# Altium PCB motordriver.PcbDoc (part 1 of 3)
Units mm, origin at the board's own origin, x right, y up, seen from the top; angles counter-clockwise.
Board outline 134.2 x 59.7 mm, 4 copper layers (Top Layer, Mid-Layer 2, Mid-Layer 1, Bottom Layer); 185 components, 161 nets, 637 pads, 1528 vias.
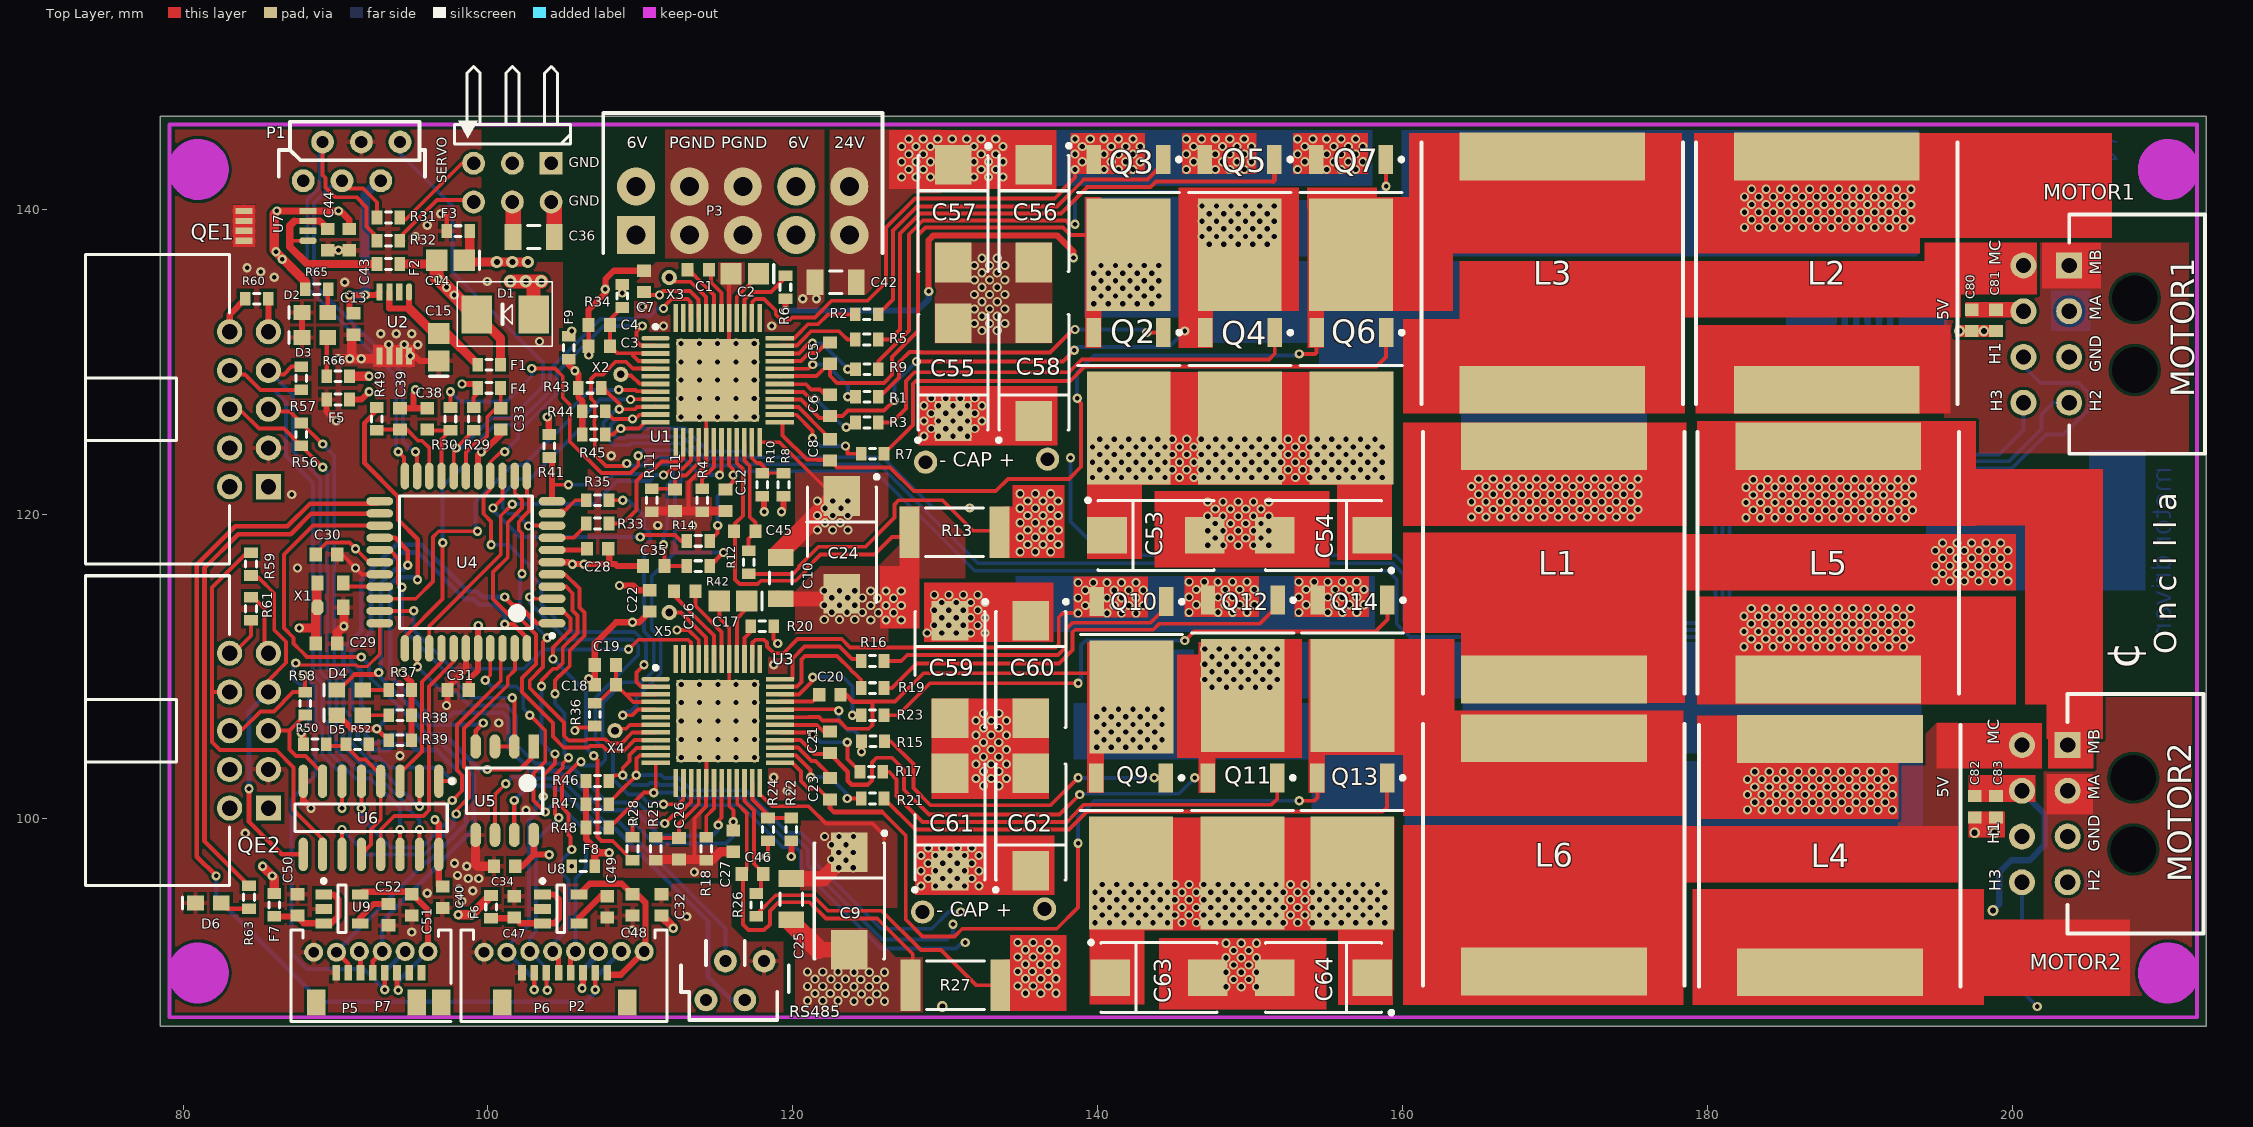
[diagram p0: Top Layer view]
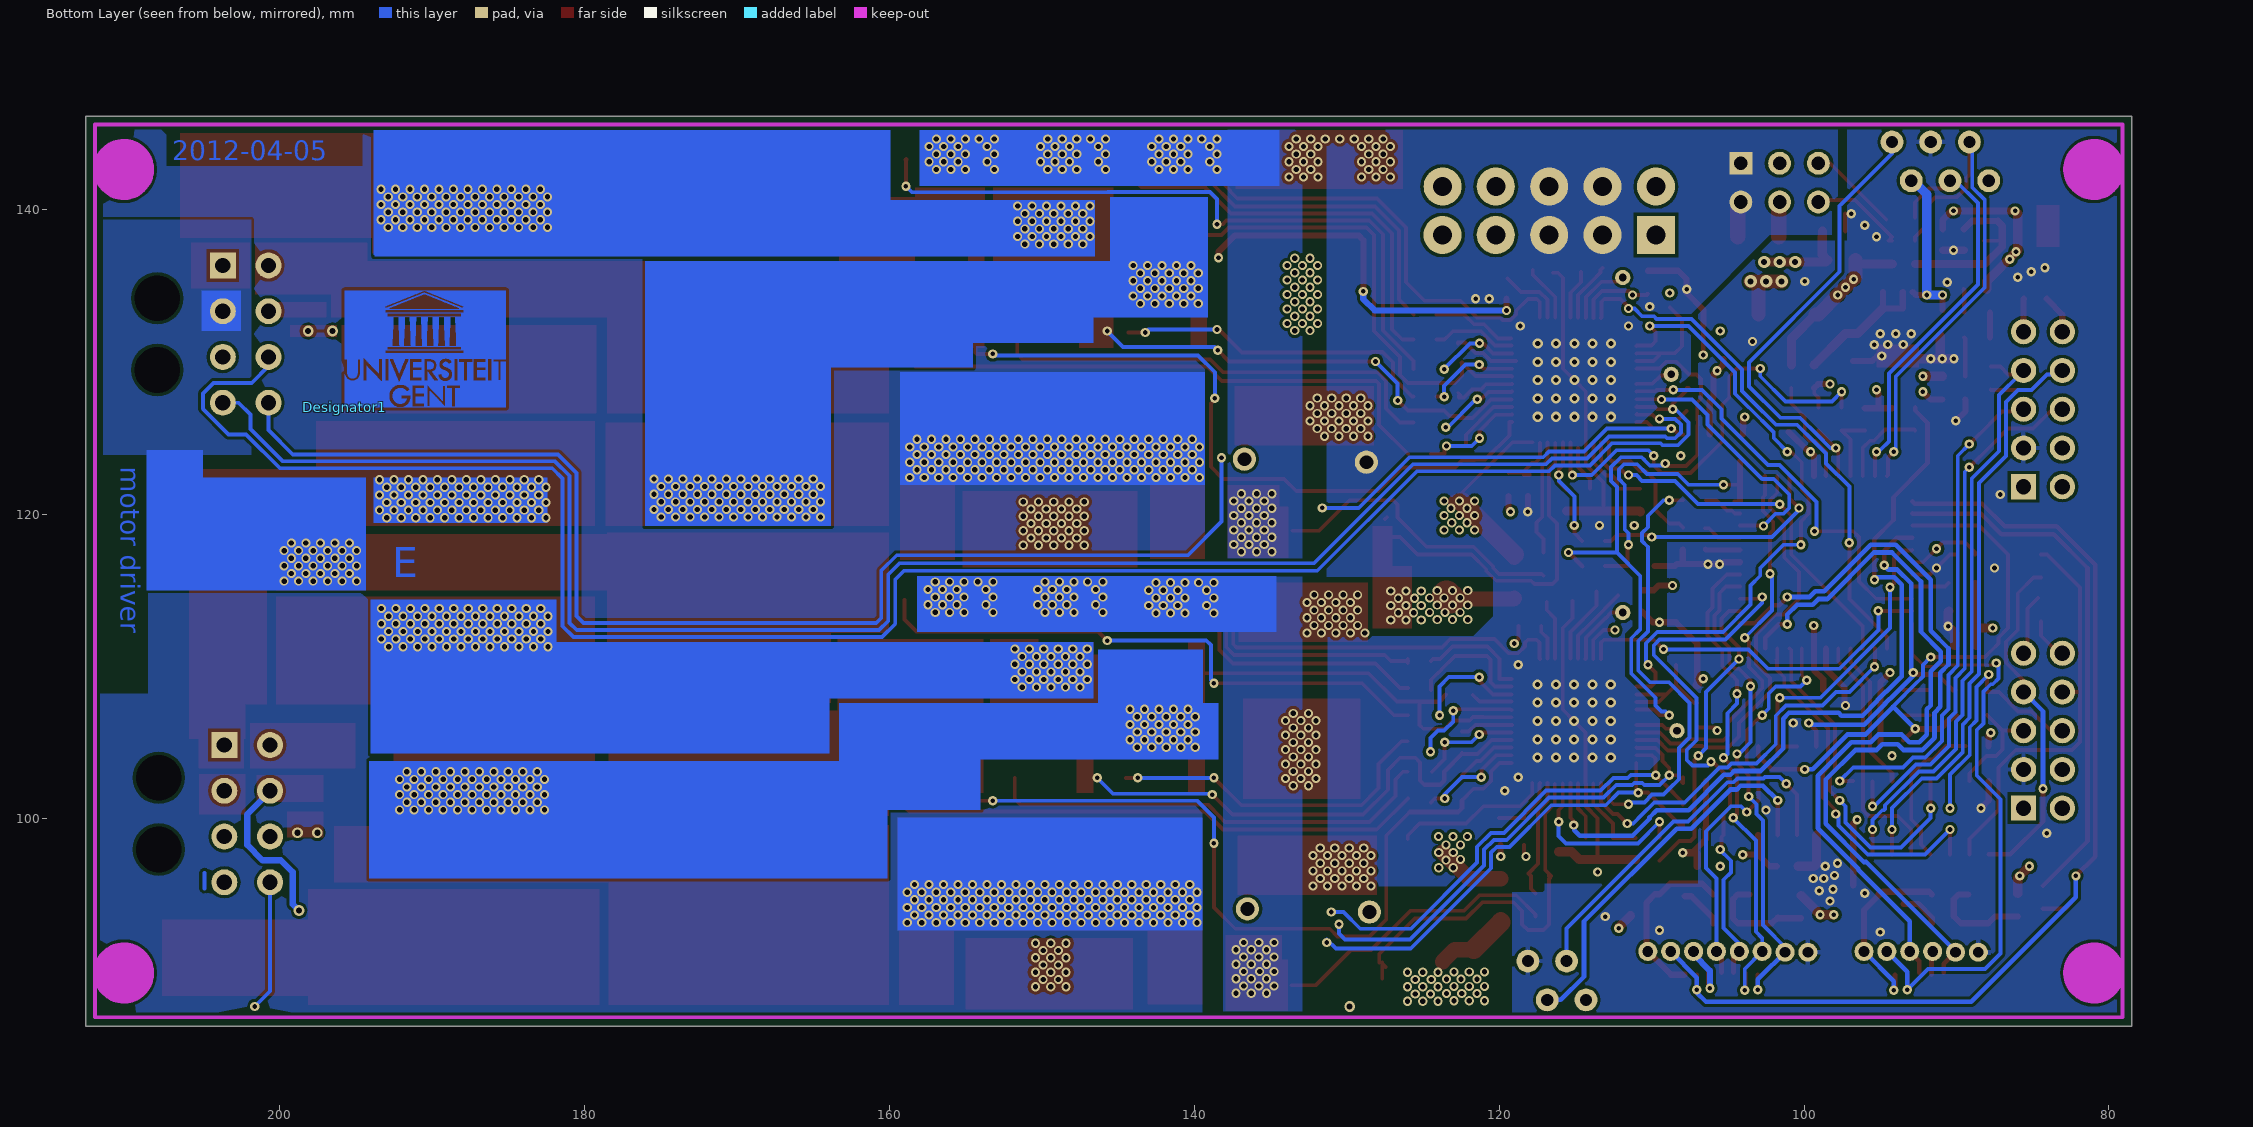
[diagram p1: Bottom Layer view, seen from below]
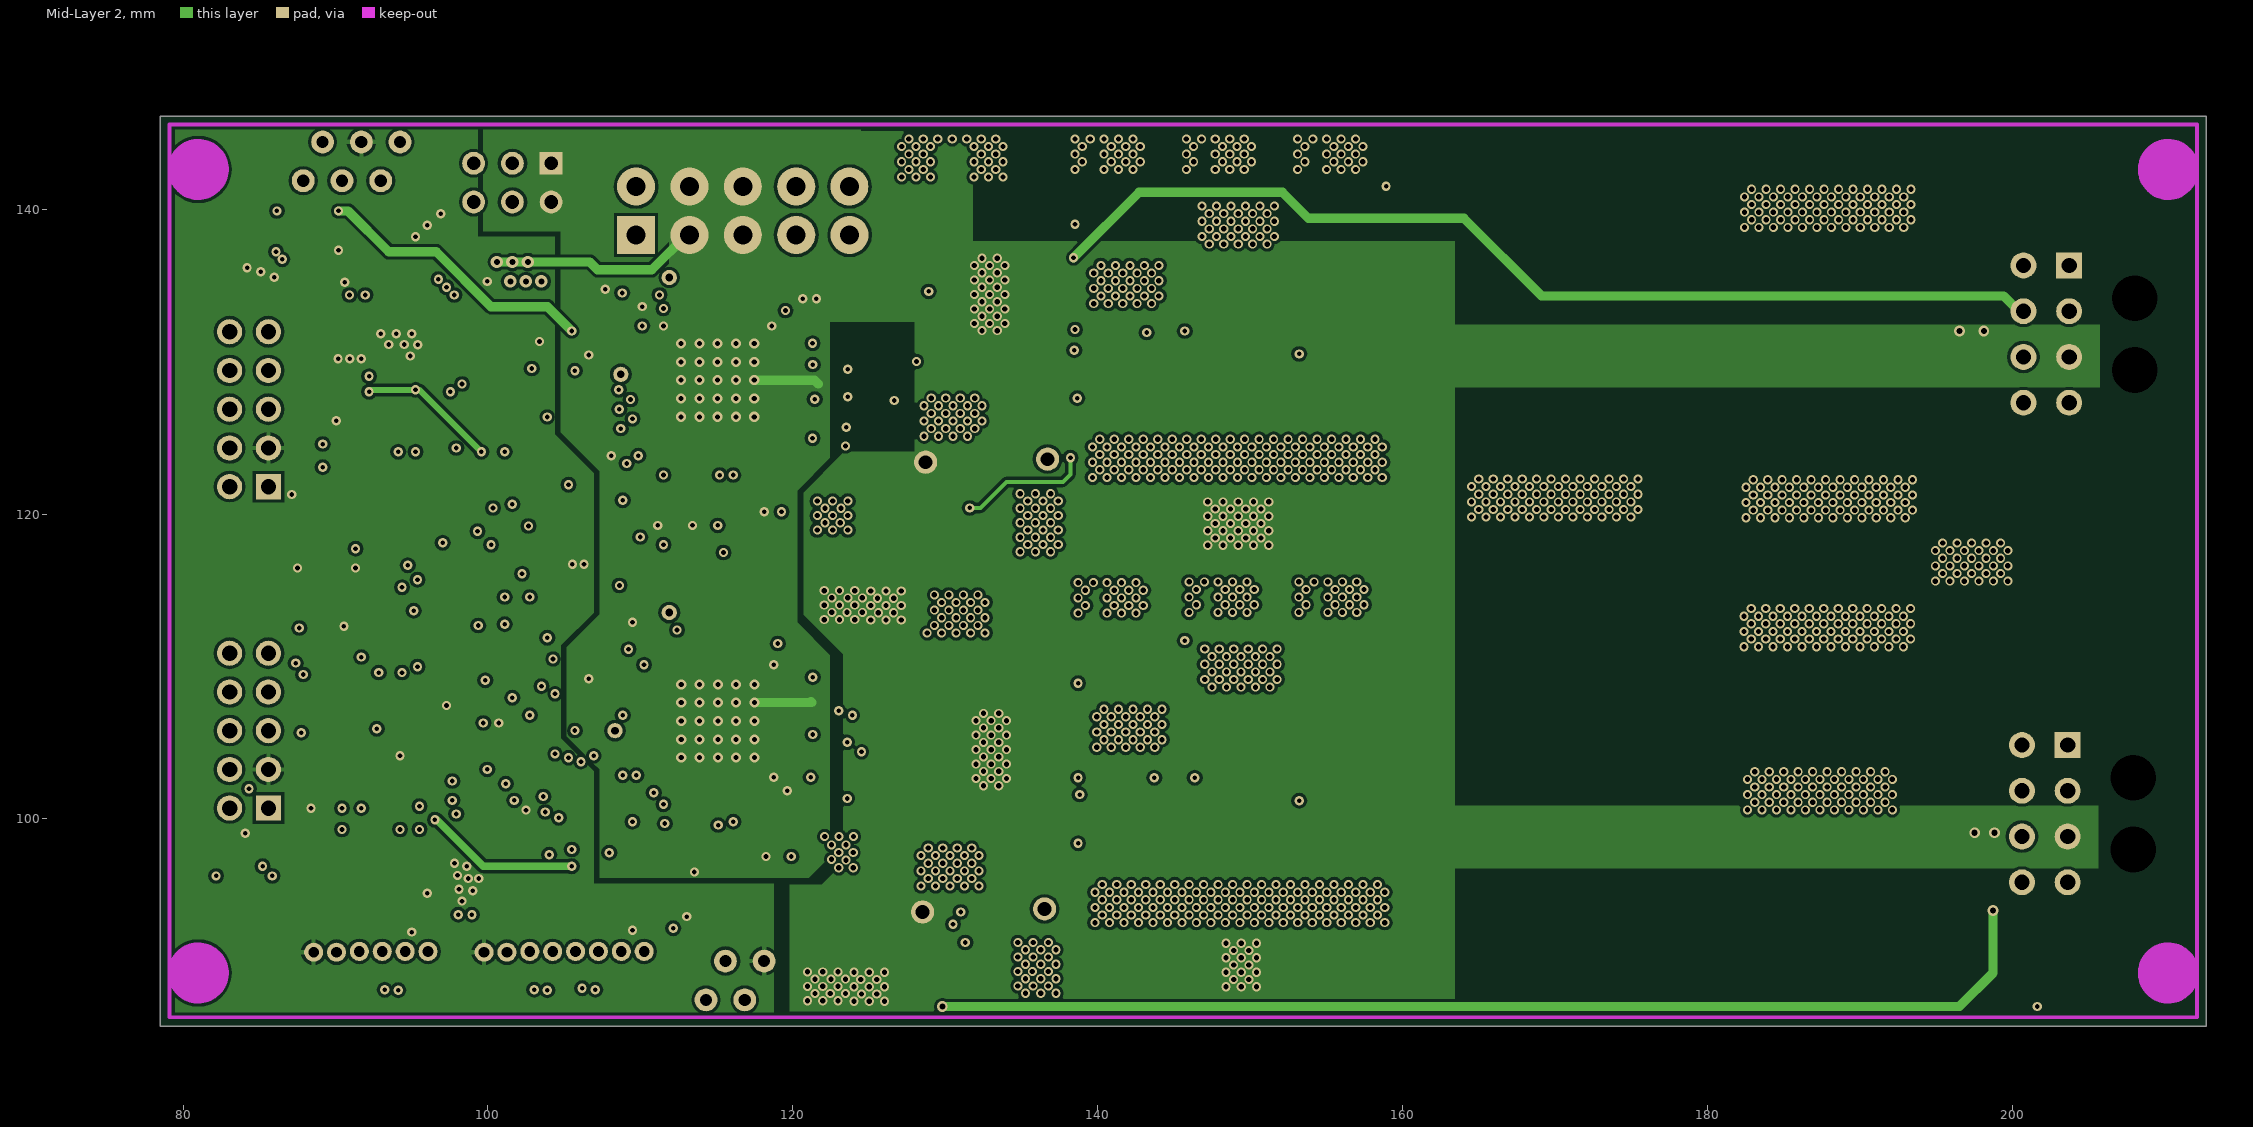
[diagram p2: Mid-Layer 2]
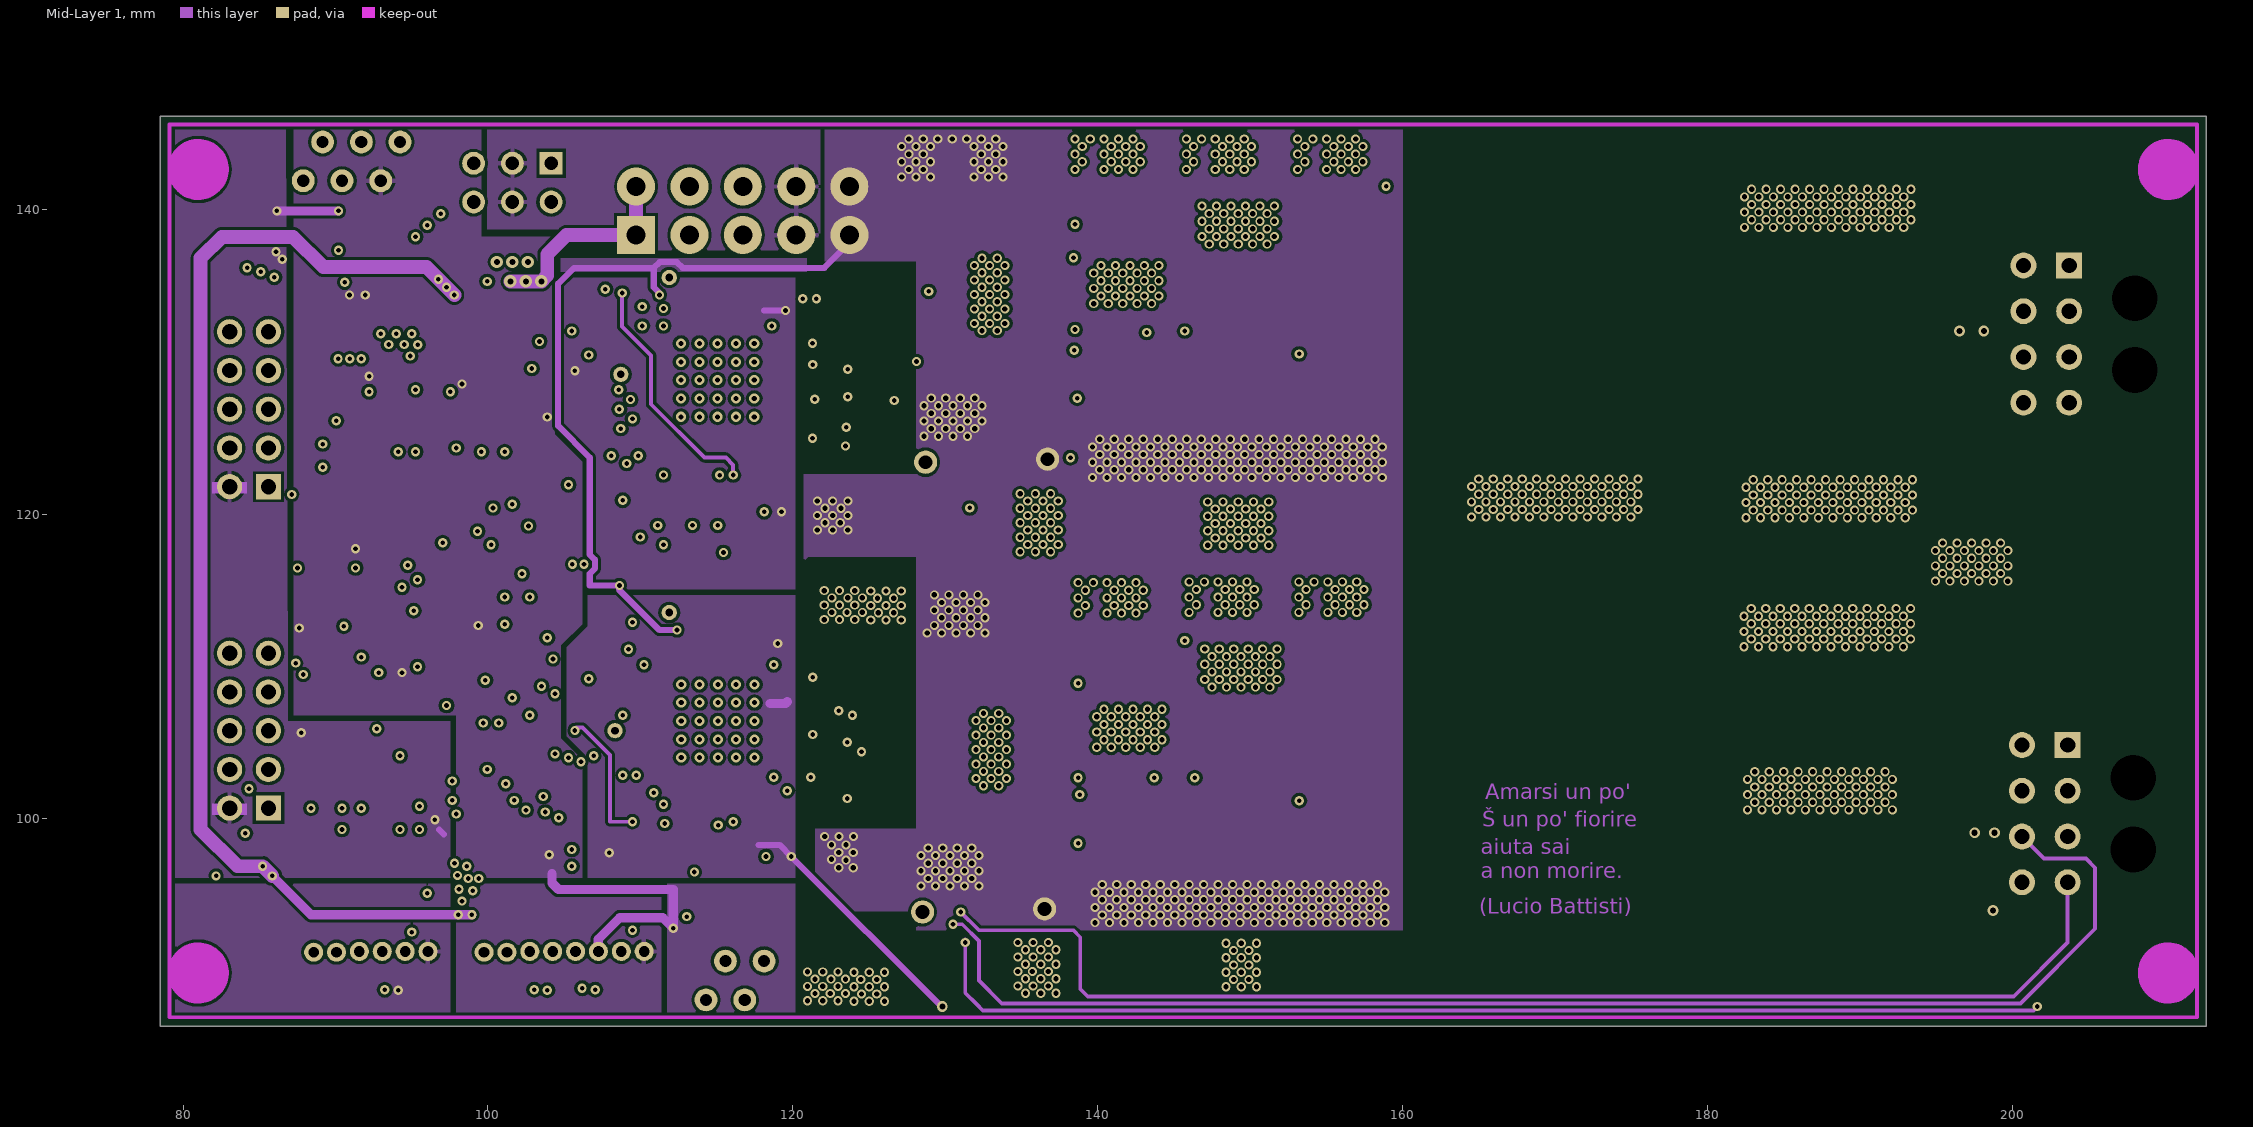
[diagram p3: Mid-Layer 1]

## Layer stack, top to bottom
Top Layer: signal copper 0.0356
Dielectric: core 0.32, FR-4, Dk 4.8
Mid-Layer 2: signal copper 0.0356
Dielectric: prepreg 0.32, FR-4, Dk 4.8
Mid-Layer 1: signal copper 0.0356
Dielectric: core 0.32, FR-4, Dk 4.8
Bottom Layer: signal copper 0.0356

## Board outline
78.5,86.4 78.5,146.1 212.7,146.1 212.7,86.4

## Design rules (kind name [scope] priority, off if disabled: settings)
Clearance [(InPadClass('All Pads')) vs (InPadClass('All Pads'))] p1: gap=0.191
Clearance Clearance_1 [All] p2: gap=0.203
FabricationTestpoint [(IsPad And (OnTopLayer Or OnBottomLayer))] p1: side=3 testpointundercomponent=TRUE minsize=1.016 maxsize=2.54 preferedsize=1.524 minholesize=0 maxholesize=1.016 preferedholesize=0.813 testpointgrid=0.025 allowsidetop=TRUE allowsidebottom=TRUE usegrid=TRUE gridtolerance=0
HoleSize [All] p1: absolutevalues=TRUE maxlimit=3.048 minlimit=0.254 maxpercent=80.000 minpercent=20.000
MinimumSolderMaskSliver [All] p1: minsoldermaskwidth=0.2
PlaneConnect [All] p1: planeconnectstyle=Relief reliefexpansion=0.508 reliefentries=4 reliefconductorwidth=0.406 reliefairgap=0.254
PolygonConnect PolygonConnect_5 [IsVia] p1: connectstyle=Direct reliefconductorwidth=0.254 reliefentries=4 polygonreliefangle="90 Angle"
PolygonConnect PolygonConnect_4 [InNet('AGND')] p2: connectstyle=Direct reliefconductorwidth=0.254 reliefentries=4 polygonreliefangle="90 Angle"
PolygonConnect PolygonConnect_3 [InNet('VMOTOR') And OnLayer('Top Layer')] p3: connectstyle=Direct reliefconductorwidth=0.406 reliefentries=4 polygonreliefangle="90 Angle"
PolygonConnect PolygonConnect_1 [(InNet('NetQ3_3') OR InNet('NetQ10_3'))] p4: connectstyle=Direct reliefconductorwidth=0.254 reliefentries=4 polygonreliefangle="90 Angle"
PolygonConnect [InNet('VMOTOR') And OnLayer('Mid-Layer 1')] p5: connectstyle=Direct reliefconductorwidth=0.406 reliefentries=4 polygonreliefangle="90 Angle"
PolygonConnect PolygonConnect_2 [All] p6: connectstyle=Relief reliefconductorwidth=0.305 reliefentries=4 polygonreliefangle="90 Angle"
RoutingLayers [All] p1: top layer_v5=TRUE mid layer 1_v5=FALSE mid layer 2_v5=FALSE bottom layer_v5=TRUE
RoutingVias [All] p1: holewidth=0.305 width=0.61 viastyle="Through Hole" minholewidth=0.305 minwidth=0.5 maxholewidth=3.048 maxwidth=3.81
SilkscreenOverComponentPads [All] p1: minsilkscreentomaskgap=0.1
SolderMaskExpansion [All] p1: expansion=0
Width [All] p1: maxlimit=3.81 minlimit=0.203 preferedwidth=0.254
22 further rules are at their usual default settings.

## Classes and differential pairs
component class connectors: C32 C36 C40 C80 C81 C82 C83 MOTOR1 MOTOR2 P2 P3 P5 P6 P7 QE1 QE2 R43 R44 R45 R46 R47 R48 R50 R52 R56 R57 R58 R59 R60 R61 RS485 SERVO U6
component class driver1: C1 C2 C3 C4 C5 C6 C7 C8 C9 C10 C11 C12 C45 C53 C54 C55 C56 C57 C58 L1 L2 L3 Q2 Q3 Q4 Q5 Q6 Q7 R1 R2 R3 R4 R5 R6 R7 R8 R9 R10 R11 R12 R13 R14 R34 U1 X2 X3
component class driver2: C16 C17 C18 C19 C20 C21 C22 C23 C24 C25 C26 C27 C46 C59 C60 C61 C62 C63 C64 L4 L5 L6 Q9 Q10 Q11 Q12 Q13 Q14 R15 R16 R17 R18 R19 R20 R21 R22 R23 R24 R25 R26 R27 R28 R36 U3 X4 X5
component class dsPIC: C28 C29 C30 C31 C33 C34 C35 C38 C39 D4 D5 D6 F4 F5 P1 R29 R30 R31 R32 R33 R35 R37 R38 R39 R41 R42 R49 R63 U4 U5 X1
component class power: C13 C14 C15 C42 C43 C44 C47 C48 C49 C50 C51 C52 D1 D2 D3 F1 F2 F3 F6 F7 F8 F9 R65 R66 U2 U7 U8 U9

## Components (designator, comment, footprint, x,y, rotation, side; value= is the part's Value field where it differs from the comment)
C1 "470nF, 25V" CAPC1608L 113.792,136.017 r180 top
C2 "4.7uF, 25V" CAPC2512L 116.84,135.763 r180 top
C3 "100nF" CAPC1608L 107.3,131 r0 top
C4 "4.7uF, 10V" CAPC1608L 107.3,132.4 r0 top
C5 "100nF" CAPC1608L 122.428,130.556 r270 top
C6 "100nF" CAPC1608L 122.428,127.127 r270 top
C7 "100nF" CAPC1608L 110.236,135.255 r270 top
C8 "100nF" CAPC1608L 122.428,124.206 r270 top
C9 "47uF, 35V" 7343 123.698,94.615 r270 top
C10 "10uF, 50V" CAPC3216L 119.2,115.8 r90 top
C11 "1nF" CAPC1608L 112.268,120.904 r90 top
C12 "100nF" CAPC1608L 115.57,120.904 r90 top
C13 "10uF, 6.3V" CAPC1608L 91.186,132.461 r90 top
C14 "10uF, 16V" CAPC2512L 97.536,136.652 r180 top
C15 "1uF, 25V" CAPC2512L 96.774,130.937 r90 top
C16 "470nF, 25V" CAPC1608L 112.903,114.935 r180 top
C17 "4.7uF, 25V" CAPC2512L 116.078,114.3 r180 top
C18 "100nF" CAPC1608L 107.7,108.8 r0 top
C19 "4.7uF, 10V" CAPC1608L 107.7,110.1 r0 top
C20 "100nF" CAPC1608L 122.428,108.139 r0 top
C21 "100nF" CAPC1608L 122.428,105.029 r270 top
C22 "100nF" CAPC1608L 110.617,114.3 r90 top
C23 "100nF" CAPC1608L 122.428,101.981 r270 top
C24 "47uF, 35V" 7343 123.19,117.983 r270 top
C25 "10uF, 50V" CAPC3216L 119.888,94.742 r90 top
C26 "1nF" CAPC1608L 112.534,98.044 r90 top
C27 "100nF" CAPC1608L 116.078,98.552 r90 top
C28 "10uF, 6.3V" CAPC1608L 107.188,117.729 r180 top
C29 "100nF" CAPC1608L 89.408,111.506 r180 top
C30 "100nF" CAPC1608L 89.408,117.348 r180 top
C31 "100nF" CAPC1608L 98.044,108.458 r0 top
C32 "100nF" CAPC1608L 111.379,94.361 r270 top
C33 "1uF, 25V" CAPC1608L 100.838,126.238 r90 top
C34 "100nF" CAPC1608L 101.092,96.901 r180 top
C35 "10nF" CAPC1608L 110.871,116.586 r0 top
C36 "22uF, 16V" CAPC3216L 102.997,138.176 r180 top
C38 "100nF" CAPC1608L 96.012,126.238 r270 top
C39 "100nF" CAPC1608L 94.234,126.238 r270 top
C40 "100nF" CAPC1608L 97.028,94.869 r90 top
C42 "10uF, 50V" CAPC3216L 122.8,135.2 r0 top
C43 "10uF, 6.3V" CAPC1608L 90.9,138 r90 top
C44 "1uF, 25V" CAPC1608L 89.5,138 r90 top
C45 "1nF" CAPC1608L 116.84,118.872 r0 top
C46 "1nF" CAPC1608L 117.348,96.393 r0 top
C47 "1uF, 25V" CAPC1608L 101.727,94.234 r270 top
C48 "10uF, 6.3V" CAPC1608L 109.474,94.361 r90 top
C49 "10nF" CAPC1608L 107.823,94.234 r90 top
C50 "1uF, 25V" CAPC1608L 87.503,94.361 r270 top
C51 "10uF, 6.3V" CAPC1608L 94.996,94.361 r90 top
C52 "10nF" CAPC1608L 93.472,93.726 r90 top
C53 "47uF, 35V" 7343 143.8,118.6 r0 top
C54 "47uF, 35V" 7343 154.8,118.6 r180 top
C55 "47uF, 35V" 7343 130.5,129.3 r90 top
C56 "47uF, 35V" 7343 135.8,139.7 r270 top
C57 "47uF, 35V" 7343 130.5,139.7 r270 top
C58 "47uF, 35V" 7343 135.8,129.3 r90 top
C59 "47uF, 35V" 7343 130.3,109.8 r270 top
C60 "47uF, 35V" 7343 135.6,109.8 r270 top
C61 "47uF, 35V" 7343 130.3,99.8 r90 top
C62 "47uF, 35V" 7343 135.6,99.8 r90 top
C63 "47uF, 35V" 7343 144,89.6 r0 top
C64 "47uF, 35V" 7343 154.8,89.6 r180 top
C80 "1uF" CAPC1608L 197.3,132.7 r90 top
C81 "100nF" CAPC1608L 198.9,132.7 r90 top
C82 "1uF" CAPC1608L 197.5,100.8 r90 top
C83 "100nF" CAPC1608L 198.9,100.8 r90 top
D1 "DIODE-TRANSIL-GENERIC" DIODE-SMB 102.997,133.096 r0 top
D2 "LED Green" CD1608-0603 88.646,133.223 r180 top
D3 "LED Green" CD1608-0603 88.646,131.572 r180 top
D4 "LED Yellow" CD1608-0603 90.932,108.458 r180 top
D5 "LED Red" CD1608-0603 90.932,106.807 r180 top
D6 "LED Green" CD1608-0603 81.661,94.488 r180 top
Designator1 "Comment" ? 195.7,127 r180 bottom
F1 "Ferrit 0.35R 500mA" RESC1608L 100.076,129.794 r180 top
F2 "Ferrit 0.35R 500mA" RESC1608L 93.472,136.398 r180 top
F3 "Ferrit 0.35R 500mA" RESC1608L 98.044,138.557 r0 top
F4 "Ferrit 0.35R 500mA" RESC1608L 100.076,128.27 r0 top
F5 "Ferrit 0.35R 500mA" RESC1608L 90.17,127.508 r0 top
F6 "Ferrit 0.35R 500mA" RESC1608L 100.203,94.234 r270 top
F7 "Ferrit 0.35R 500mA" RESC1608L 85.979,94.361 r270 top
F8 "Ferrit 0.35R 500mA" RESC1608L 106.25,96.9 r180 top
F9 "Ferrit 0.35R 500mA" RESC1608L 105.3,130.9 r90 top
L1 "68 µH" IHLP-6767GZ-11 169.9,116.8 r270 top
L2 "68 µH" IHLP-6767GZ-11 187.8,135.8 r270 top
L3 "68 µH" IHLP-6767GZ-11 169.8,135.8 r270 top
L4 "68 µH" IHLP-6767GZ-11 188,97.6 r270 top
L5 "68 µH" IHLP-6767GZ-11 187.9,116.8 r90 top
L6 "68 µH" IHLP-6767GZ-11 169.9,97.648 r270 top
MOTOR1 "MC34341" MC34341 202.2,131.8 r90 top
MOTOR2 "MC34341" MC34341 202.1,100.35 r90 top
P1 "6WAY_TERMINAL" MICROMATCH_6WAY_SE 90.424,143.129 r180 top
P2 "8WAY_SUR_CONNECTOR" CONNECTOR_8WAY_0.8MM 105.029,89.916 r0 top
P3 "5WAY_JST_POWER" TERMINAL_5WAY_35 116.713,138.303 r0 top
P5 "6WAY_TERMINAL" CONNECTOR_6WAY_RA_1.5MM 91.567,91.313 r0 top
P6 "8WAY_TERMINAL" CONNECTOR_8WAY_RA_1.5MM 102.743,91.313 r0 top
P7 "6+8WAY_SUR_CONNECTOR" CONNECTOR_6+8WAY_0.8MM 92.837,89.916 r0 top
Q2 "IRFR48Z" TO-252AA_N 142.02,127.4 r270 top
Q3 "IRFR48Z" TO-252AA_N 142,138.75 r270 top
Q4 "IRFR48Z" TO-252AA_N 149.32,127.4 r270 top
Q5 "IRFR48Z" TO-252AA_N 149.3,138.75 r270 top
Q6 "IRFR48Z" TO-252AA_N 156.62,127.4 r270 top
Q7 "IRFR48Z" TO-252AA_N 156.6,138.75 r270 top
Q9 "IRFR48Z" TO-252AA_N 142.18,98.2 r270 top
Q10 "IRFR48Z" TO-252AA_N 142.2,109.75 r270 top
Q11 "IRFR48Z" TO-252AA_N 149.48,98.2 r270 top
Q12 "IRFR48Z" TO-252AA_N 149.5,109.85 r270 top
Q13 "IRFR48Z" TO-252AA_N 156.68,98.2 r270 top
Q14 "IRFR48Z" TO-252AA_N 156.7,109.85 r270 top
QE1 "09 18 510 7323" 918510x323 83.058,126.873 r90 top
QE2 "09 18 510 7323" 918510x323 83.058,105.791 r90 top
R1 "22R" RESC1608L 124.85,127.7 r0 top
R2 "22R" RESC1608L 124.841,133.096 r0 top
R3 "22R" RESC1608L 124.85,126 r0 top
R4 "10k" RESC1608L 114.046,120.904 r90 top
R5 "22R" RESC1608L 124.841,131.445 r0 top
R6 "1k" RESC1608L 119.507,134.874 r90 top
R7 "22R" RESC1608L 125.222,123.952 r0 top
R8 "10k" RESC1608L 119.38,121.92 r270 top
R9 "22R" RESC1608L 124.85,129.5 r0 top
R10 "1k" RESC1608L 117.983,121.92 r90 top
R11 "27k" RESC1608L 110.744,120.904 r90 top
R12 "0R" RESC1608L 117.094,116.84 r270 top
R13 "20mR" RESC6332N 130.6,118.8 r0 top
R14 "4.7k" RESC1608L 113.792,118.237 r0 top
R15 "22R" RESC1608L 125.25,105.1 r0 top
R16 "22R" RESC1608L 125.222,110.363 r0 top
R17 "22R" RESC1608L 125.15,103.1 r0 top
R18 "10k" RESC1608L 114.312,98.044 r90 top
R19 "22R" RESC1608L 125.222,108.585 r0 top
R20 "1k" RESC1608L 117.983,112.649 r180 top
R21 "22R" RESC1608L 125.222,101.346 r0 top
R22 "10k" RESC1608L 119.888,99.314 r270 top
R23 "22R" RESC1608L 125.222,106.8 r0 top
R24 "1k" RESC1608L 118.364,99.314 r90 top
R25 "27k" RESC1608L 111.01,98.044 r90 top
R26 "0R" RESC1608L 117.602,94.361 r270 top
R27 "20mR" RESC6332N 130.65,89.1 r0 top
R28 "4.7k" RESC1608L 109.474,98.044 r90 top
R29 "10k" RESC1608L 99.06,126.238 r90 top
R30 "4.7k" RESC1608L 97.536,126.238 r90 top
R31 "470R" RESC1608L 93.472,139.446 r0 top
R32 "470R" RESC1608L 93.472,137.922 r0 top
R33 "100R" RESC1608L 107.188,119.38 r0 top
R34 "0R" RESC1608L 108.8,134.3 r270 top
R35 "100R" RESC1608L 107.188,120.904 r0 top
R36 "0R" RESC1608L 107,106.85 r90 top
R37 "470R" RESC1608L 94.234,108.458 r180 top
R38 "470R" RESC1608L 94.234,106.807 r180 top
R39 "10k" RESC1608L 94.234,105.156 r0 top
R41 "10k" RESC1608L 104.013,124.46 r90 top
R42 "100R" RESC1608L 113.792,116.586 r0 top
R43 "4.7k" RESC1608L 106.68,128.27 r0 top
R44 "4.7k" RESC1608L 106.934,126.746 r0 top
R45 "4.7k" RESC1608L 106.934,125.222 r0 top
R46 "4.7k" RESC1608L 107.176,102.489 r0 top
R47 "4.7k" RESC1608L 107.176,100.965 r0 top
R48 "4.7k" RESC1608L 107.176,99.441 r0 top
R49 "4.7k" RESC1608L 92.71,126.238 r90 top
R50 "0R" RESC1608L 88.646,104.902 r180 top
R52 "10k" RESC1608L 91.44,104.902 r180 top
R56 "120R" RESC1608L 87.757,125.222 r90 top
R57 "120R" RESC1608L 87.757,128.905 r90 top
R58 "120R" RESC1608L 88.011,107.569 r270 top
R59 "120R" RESC1608L 84.455,116.713 r270 top
R60 "120R" RESC1608L 84.836,134.112 r0 top
R61 "120R" RESC1608L 84.455,113.792 r90 top
R63 "470R" RESC1608L 84.328,94.869 r90 top
R65 "2k2" RESC1608L 88.773,134.747 r180 top
R66 "470R" RESC1608L 90.17,129.032 r0 top
RS485 "4WAY_TERMINAL" MICROMATCH_4WAY_SE 116.84,89.408 r0 top
SERVO "Header 3X2H" HDR2X3H 104.14,143.002 r180 top
U1 "A3930" TSQFP50P900X900X160_HS-48N 115.062,128.778 r0 top
U2 "MIC5239-3.3YMM" MSOP-8 93.853,132.461 r270 top
U3 "A3930" TSQFP50P900X900X160_HS-48N 115.074,106.426 r0 top
U4 "DSPIC33FJ128MC804-E/PT" TQFP-PT44_N 98.552,116.84 r180 top
U5 "ADM3078E" SOIC-8_M 101.092,101.854 r270 top
U6 "MC3486D" 751B-03_N 92.329,100.076 r270 top
U7 "MIC5239-5.0YMM" MSOP-8 86.1,138.9 r180 top
U8 "LP2992AIM5-5.0" MF05A_N 104.775,94.107 r0 top
U9 "LP2992AIM5-3.3" MF05A_N 90.424,94.107 r0 top
X1 "ASDM1-8.000MHZ-LC-T" Crystal-Oscillator-2520 89.662,114.681 r0 top
X2 "1WAY_TERMINAL" "TESTPIN 0.5MM" 108.712,129.159 r0 top
X3 "1WAY_TERMINAL" "TESTPIN 0.5MM" 111.887,135.509 r0 top
X4 "1WAY_TERMINAL" "TESTPIN 0.5MM" 108.331,105.791 r0 top
X5 "1WAY_TERMINAL" "TESTPIN 0.5MM" 111.887,113.538 r0 top

## Footprints (in the part's own frame and the unit in brackets; to place one, negate y for a bottom-side part, rotate by r counter-clockwise, add the part's x,y. Pads: shape width x height; smd on the part's side, far side on the other; paste and mask are expansions set on the pad)
751B-03_N [mm] "SOIC, 16-Leads, Body 9.9x3.9mm, Pitch 1.27mm, IPC Medium Density"
  oval 2.2x0.6 smd: 1(-2.4,4.445) 2(-2.4,3.175) 3(-2.4,1.905) 4(-2.4,0.635) 5(-2.4,-0.635) 6(-2.4,-1.905) 7(-2.4,-3.175) 8(-2.4,-4.445) 9(2.4,-4.445) 10(2.4,-3.175) 11(2.4,-1.905) 12(2.4,-0.635) 13(2.4,0.635) 14(2.4,1.905) 15(2.4,3.175) 16(2.4,4.445)
  silkscreen extent -2.52,-5 0.9,5.42, body extent -1.95,-4.95 1.95,4.95, height 1.75
7343 [mm]
  rect 2.6x2.4 smd: 1(-3.2,0) 2(3.2,0)
  silkscreen extent -4.57,-2.3 3.8,2.43, body extent -3.81,-2.29 3.81,2.29, height 4.3
918510x323 [mm] "Connector; IDC, Low Profile Male Header, Thru-Hole; 10 Position; Right Angle; Pitch 2.54 mm; Body 20.32 x 8.9 x 9.2 mm (LxWxH)"
  rect 1.65x1.65 hole 1: 1(-5.08,-2.54)
  round 1.65 hole 1: 2(-5.08,0) 3(-2.54,-2.54) 4(-2.54,0) 5(0,-2.54) 6(0,0) 7(2.54,-2.54) 8(2.54,0) 9(5.08,-2.54) 10(5.08,0)
  silkscreen extent -10.16,0 10.16,9.45
CAPC1608L [mm] "Chip Capacitor, Body 1.6x0.8mm, IPC High Density"
  rect 0.8x0.9 smd: 1(-0.7,0) 2(0.7,0)
  body extent -0.87,-0.48 0.87,0.48, height 1.3
CAPC2512L [mm] "Chip Capacitor, Body 2.54x1.27mm, IPC High Density"
  rect 1.4x1.4 smd: 1(-0.9,0) 2(0.9,0)
  silkscreen extent -1.9,-0.6 -1.9,0.6, body extent -1.45,-0.82 1.45,0.82, height 1.3
CAPC3216L [mm] "Chip Capacitor, Body 3.2x1.6mm, IPC High Density"
  rect 1.1x1.7 smd: 1(-1.35,0) 2(1.35,0)
  silkscreen extent -0.4,-0.75 0.4,0.75, body extent -1.7,-0.9 1.7,0.9, height 1.3
CD1608-0603 [mm] "Chip Diode; Body 1.6 x 0.8 mm (LxW typ)"
  rect 1.1x1 smd: 1(-0.85,0) 2(0.85,0)
  silkscreen extent 1.7,-0.4 1.7,0.4
CONNECTOR_6+8WAY_0.8MM [mm]
  rect 0.5x1 smd: 1(-2.8,0) 2(-2,0) 3(-1.2,0) 4(-0.4,0) 5(0.4,0) 6(1.2,0) 7(2,0) 8(2.8,0)
  rect 1.2x1.7 smd: A(-4.1,-1.95) B6(2.5,-1.95) B8(4.1,-1.95)
CONNECTOR_6WAY_RA_1.5MM [mm]
  round 1.25 hole 0.7: 1(-3,-0.05) 2(-1.5,-0.05) 3(0,0) 4(1.5,0) 5(3,0) 6(4.5,0)
  silkscreen extent -4.5,-4.6 6,1.4, body extent -4.5,-4.6 6,1.4, height 3.7
CONNECTOR_8WAY_0.8MM [mm]
  rect 0.5x1 smd: 1(-2.8,0) 2(-2,0) 3(-1.2,0) 4(-0.4,0) 5(0.4,0) 6(1.2,0) 7(2,0) 8(2.8,0)
  rect 1.2x1.7 smd: A(-4.1,-1.95) B(4.1,-1.95)
CONNECTOR_8WAY_RA_1.5MM [mm]
  round 1.25 hole 0.7: 1(-3,-0.05) 2(-1.5,-0.05) 3(0,0) 4(1.5,0) 5(3,0) 6(4.5,0) 7(6,0) 8(7.5,0)
  silkscreen extent -4.5,-4.6 9,1.4, body extent -4.5,-4.6 9,1.4, height 3.7
Crystal-Oscillator-2520 [mm] "Crystal Package, Body 2.5x2.0mm, Pitch 1.65mm, IPC Low Density"
  oct 0.8x1 smd: 1(-0.85,-0.8)
  rect 0.8x1 smd: 2(0.85,-0.8) 3(0.85,0.8) 4(-0.85,0.8)
  body extent -1.25,-1 1.25,1, height 0.8
DIODE-SMB [mm]
  rect 2x2.5 smd: A(0,0) K(-3.75,0)
  silkscreen extent -5,-2.1 1.22,2.12, body extent -4.57,-1.95 0.8,2, height 2.23
HDR2X3H [mm] "Connector; Header; 3x2 Position; Right Angle"
  rect 1.5x1.5 hole 0.9: 1(0,0)
  round 1.5 hole 0.9: 2(0,2.54) 3(2.54,0) 4(2.54,2.54) 5(5.08,0) 6(5.08,2.54)
  silkscreen extent -1.27,-6.35 6.35,-1.27
IHLP-6767GZ-11 [mm] "IHLP-6767GZ-11 Low Profile, High Current Inductors"
  rect 3.125x12.19 smd: 1(-7.648,0) 2(7.648,0)
  silkscreen extent -8.57,-8.57 8.57,8.57, body extent -8.57,-8.57 8.57,8.57, height 7
MC34341 [mm] "MC34341 8-pin 90° power connector"
  round 0 hole 3: 0(-2.35,-5.8) 0(2.35,-5.8)
  rect 1.7x1.7 hole 1: 1(4.5,-1.5)
  round 1.7 hole 1: 2(4.5,1.5) 3(1.5,-1.5) 4(1.5,1.5) 5(-1.5,-1.5) 6(-1.5,1.5) 7(-4.5,-1.5) 8(-4.5,1.5)
  silkscreen extent -7.85,-10.4 7.85,-1.5, body extent -7.85,-10.4 7.85,-1.5, height 6.86
MF05A_N [mm] "SOT23, 5-Leads, Body 2.9x1.6mm, Pitch 0.95mm, Lead Span 2.8mm, IPC Medium Density"
  rect 1.1x0.65 smd: 1(-1.2,0.95) 2(-1.2,0) 3(-1.2,-0.95) 4(1.2,-0.95) 5(1.2,0.95)
  silkscreen extent -1.32,-1.55 0.25,1.95, body extent -0.9,-1.55 0.9,1.55, height 1.19
MICROMATCH_4WAY_SE [mm] "tyco micromatch connector 4 way side entry"
  round 1.5 hole 0.8: 1(-2.54,-1.27) 2(-1.27,1.27) 3(0,-1.27) 4(1.27,1.27)
  silkscreen extent -4.18,-2.6 2.88,2.6, body extent -4.18,-2.6 2.88,1, height 5.8
MICROMATCH_6WAY_SE [mm] "tyco micromatch connector 6 way side entry"
  round 1.5 hole 0.8: 1(-3.81,-1.27) 2(-2.54,1.27) 3(-1.27,-1.27) 4(0,1.27) 5(1.27,-1.27) 6(2.54,1.27)
  silkscreen extent -5.45,-2.6 4.15,1, body extent -5.45,-2.6 4.15,1, height 5.8
MSOP-8 [mm] "MSOP, 8-Leads, Body 3x3mm, Pitch 0.65mm, IPC Medium Density"
  oct 1.1x0.4 smd: 1(-2.1,0.975)
  rect 1.1x0.4 smd: 2(-2.1,0.325) 3(-2.1,-0.325) 4(-2.1,-0.975) 5(2.1,-0.975) 6(2.1,-0.325) 7(2.1,0.325) 8(2.1,0.975)
  body extent -1.5,-1.5 1.5,1.5, height 1.1
RESC1608L [mm] "Chip Resistor, Body 1.6x0.8mm, IPC High Density"
  rect 0.7x0.9 smd: 1(-0.75,0) 2(0.75,0)
  silkscreen extent -0.2,-0.35 0.2,0.35, body extent -0.85,-0.48 0.85,0.48, height 0.9
RESC6332N [mm] "Chip Resistor, Body 6.3x3.2mm, IPC Medium Density"
  rect 1.3x3.4 smd: 1(-2.95,0) 2(2.95,0)
  silkscreen extent -1.9,-1.6 1.9,1.6, body extent -3.17,-1.5 3.17,1.5, height 1.6
SOIC-8_M [mm] "SOIC, 8-Leads, Body 4.9x3.9mm, Pitch 1.27mm, IPC Low Density"
  rect 1.6x0.7 smd: 1(-2.9,1.905)
  oval 1.6x0.7 smd: 2(-2.9,0.635) 3(-2.9,-0.635) 4(-2.9,-1.905) 5(2.9,-1.905) 6(2.9,-0.635) 7(2.9,0.635) 8(2.9,1.905)
  silkscreen extent -1.5,-2.5 1.5,2.5, body extent -2,-2.5 2,2.5, height 1.73
TERMINAL_5WAY_35 [mm] "phoenix style pluggable screw socket"
  rect 2.5x2.5 hole 1.25: 1(-7,0)
  round 2.5 hole 1.25: 2(-3.5,0) 3(0,0) 4(3.5,0) 5(7,0)
  silkscreen extent -9.15,-1.2 9.15,8, body extent -9.15,-1.2 9.15,8, height 7
"TESTPIN 0.5MM" [mm]
  round 1 hole 0.5: 1(0,0)
TO-252AA_N [mm] "D-PAK, 4-Leads, Body 6.1x6.5mm, Pitch 2.28mm, Lead Span 9.9mm, IPC Medium Density"
  rect 1.9x0.95 smd: 1(-4.5,2.28) 3(-4.5,-2.28)
  rect 7.4x5.5 smd: 4(1.75,0)
  silkscreen extent -4.62,-3.35 -2.35,3.43, body extent -2.25,-3.37 4.1,3.37, height 2.38
TQFP-PT44_N [mm] "Thin QFP, 44-Leads, Body 10x10mm, Pitch 0.8mm, IPC Medium Density"
  oval 1.75x0.55 smd: 1(-5.65,4) 2(-5.65,3.2) 3(-5.65,2.4) 4(-5.65,1.6) 5(-5.65,0.8) 6(-5.65,0) 7(-5.65,-0.8) 8(-5.65,-1.6) 9(-5.65,-2.4) 10(-5.65,-3.2) 11(-5.65,-4) 23(5.65,-4) 24(5.65,-3.2) 25(5.65,-2.4) 26(5.65,-1.6) 27(5.65,-0.8) 28(5.65,0) 29(5.65,0.8) 30(5.65,1.6) 31(5.65,2.4) 32(5.65,3.2) 33(5.65,4)
  oval 0.55x1.75 smd: 12(-4,-5.65) 13(-3.2,-5.65) 14(-2.4,-5.65) 15(-1.6,-5.65) 16(-0.8,-5.65) 17(0,-5.65) 18(0.8,-5.65) 19(1.6,-5.65) 20(2.4,-5.65) 21(3.2,-5.65) 22(4,-5.65) 34(4,5.65) 35(3.2,5.65) 36(2.4,5.65) 37(1.6,5.65) 38(0.8,5.65) 39(0,5.65) 40(-0.8,5.65) 41(-1.6,5.65) 42(-2.4,5.65) 43(-3.2,5.65) 44(-4,5.65)
  silkscreen extent -5.77,-4.35 4.35,4.95, body extent -5,-5 5,5, height 1.2
TSQFP50P900X900X160_HS-48N [mm] "TSQFP, 48-Leads, Body 9.2x9.2mm (max), Pitch 0.50mm, IPC Medium Density"
  oval 1.85x0.3 smd: 1(-4.075,2.75)
  rect 1.85x0.3 smd: 2(-4.075,2.25) 3(-4.075,1.75) 4(-4.075,1.25) 5(-4.075,0.75) 6(-4.075,0.25) 7(-4.075,-0.25) 8(-4.075,-0.75) 9(-4.075,-1.25) 10(-4.075,-1.75) 11(-4.075,-2.25) 12(-4.075,-2.75) 25(4.075,-2.75) 26(4.075,-2.25) 27(4.075,-1.75) 28(4.075,-1.25) 29(4.075,-0.75) 30(4.075,-0.25) 31(4.075,0.25) 32(4.075,0.75) 33(4.075,1.25) 34(4.075,1.75) 35(4.075,2.25) 36(4.075,2.75)
  rect 0.3x1.85 smd: 13(-2.75,-4.075) 14(-2.25,-4.075) 15(-1.75,-4.075) 16(-1.25,-4.075) 17(-0.75,-4.075) 18(-0.25,-4.075) 19(0.25,-4.075) 20(0.75,-4.075) 21(1.25,-4.075) 22(1.75,-4.075) 23(2.25,-4.075) 24(2.75,-4.075) 37(2.75,4.075) 38(2.25,4.075) 39(1.75,4.075) 40(1.25,4.075) 41(0.75,4.075) 42(0.25,4.075) 43(-0.25,4.075) 44(-0.75,4.075) 45(-1.25,4.075) 46(-1.75,4.075) 47(-2.25,4.075) 48(-2.75,4.075)
  rect 5.4x5.4 smd: 49(0,0)
  silkscreen extent -4.2,3.38 -3.95,3.62, body extent -3.5,-3.5 3.5,3.5, height 1.6
? [mm]
  Top Layer region: 1151 vertices and 24 holes, not listed, extent 0,0 10.554,7.658
  Top Layer region: 5.601,2.972 5.652,2.972 5.652,2.959 5.69,2.959 5.69,2.946 5.715,2.946 5.715,2.934 5.74,2.934 5.74,2.921 5.753,2.921 5.753,2.908 5.766,2.908 5.766,2.896 5.779,2.896 5.779,2.883 5.791,2.883 5.791,2.87 5.804,2.87 5.804,2.845 5.817,2.845 5.817,2.807 5.829,2.807 5.829,2.68 5.817,2.68 5.817,2.642 5.804,2.642 5.804,2.616 5.791,2.616 5.791,2.591 5.779,2.591 5.779,2.578 5.766,2.578 5.766,2.565 5.753,2.565 5.753,2.553 5.728,2.553 5.728,2.54 5.702,2.54 5.702,2.527 5.677,2.527 5.677,2.515 5.626,2.515 5.626,2.502 5.55,2.502 5.55,2.489 5.41,2.489 5.41,2.984 5.601,2.984

## Part data
C1 C2 C3 C4 C5 C6 C7 C8 C10 C11 C12 C13 C14 C15 C16 C17 C18 C19 C20 C21 C22 C23 C25 C26 C27 C28 C29 C30 C31 C32 C33 C34 C35 C36 C38 C39 C40 C42 C43 C44 C45 C46 C47 C48 C49 C50 C51 C52 C80 C81 C82 C83: library part "Cap Semi", "Capacitor (Semiconductor SIM Model)"
C9 C24 C53 C54 C55 C56 C57 C58 C59 C60 C61 C62 C63 C64: library part 255D157X06R3D2T045
D1: "GENERIC TRANSIL"
D2 D3 D4 D5 D6: library part LED, "LED"
F1 F2 F3 F4 F5 F6 F7 F8 F9: library part "Fuse 1", "Ferrit Bead"
L1 L2 L3 L4 L5 L6: library part IHLP-6767GZ-11, "IHLP-6767GZ-11 Low Profile, High Current Inductors"
MOTOR1 MOTOR2: "MC34341 - STECKER,90°,8KONT"
Q2 Q3 Q4 Q5 Q6 Q7 Q9 Q10 Q11 Q12 Q13 Q14: library part IRFR110, "HEXFET Power MOSFET"
QE1 QE2: "Flat Cable Connector (IDC), Low-Profile Male Header, Angled Solder Pin, 10 Contacts, Performance Level 3"
R1 R2 R3 R4 R5 R6 R7 R8 R9 R10 R11 R12 R14 R15 R16 R17 R18 R19 R20 R21 R22 R23 R24 R25 R26 R28 R29 R30 R31 R32 R33 R34 R35 R36 R37 R38 R39 R41 R42 R43 R44 R45 R46 R47 R48 R49 R50 R52 R56 R57 R58 R59 R60 R61 R63 R65 R66: library part "Res Semi", "Semiconductor Resistor"
R13 R27: library part Res2, "Resistor"
SERVO: "Header, 3-Pin, Dual row, Right Angle"
U1 U3: "brushless motor driver, 3-phase"
U2 U7: library part MIC5239, "LDO, 500mA, Vin:2.3V-30V"
U4: "High-Performance 16-bit Digital Signal Controller, 128 KB Flash, 16 KB RAM, 44-Pin TQFP, Extended High Temperature"
U5: "Half-Duplex RS485 Transciever, 3.3V, 16Mbps"
U6: "Quad EIA-422/423 Line Receiver"
U8: "Micropower 250 mA Low-Noise Ultra Low-Dropout Regulator in SOT-23 and LLP Packages"
U9: library part LP2992AIM5-5.0, "Micropower 250 mA Low-Noise Ultra Low-Dropout Regulator in SOT-23 and LLP Packages"
X1: library part Oscillator, "Oscillator"

## Free pads (board coordinates)
  round 0 hole 2.2: 0(81,89.9) 0(81,142.6) 0(210.2,142.6) 0(210.2,89.9)
  round 1.524 hole 0.9: 0(128.5,93.9) 0(128.7,123.4) 0(136.5,94.1) 0(136.7,123.6)
  round 2.5 hole 1.25: ""(109.713,141.478) ""(113.213,141.478) ""(116.713,141.478) ""(120.213,141.478) ""(123.698,141.478)

## Via types
v1: diameter 0.6, hole 0.35, Top Layer to Bottom Layer, tented both sides, 1228 vias
v2: diameter 0.61, hole 0.305, Top Layer to Bottom Layer, tented both sides, 235 vias
v3: diameter 0.66, hole 0.33, Top Layer to Bottom Layer, tented top, 50 vias
v4: diameter 0.813, hole 0.406, Top Layer to Bottom Layer, tented both sides, 6 vias
v5: diameter 0.7, hole 0.4, Top Layer to Bottom Layer, tented both sides, 4 vias
v6: diameter 0.61, hole 0.305, Top Layer to Bottom Layer, 2 vias
v7: diameter 0.7, hole 0.4, Top Layer to Bottom Layer, tented bottom, 2 vias
v8: diameter 0.61/0.61/0.61/0.61 (per signal layer), hole 0.305, Top Layer to Bottom Layer, tented both sides, 1 vias

## Nets (pads, with @x,y where several pads share a name; then routed paths per layer and width w, separated by ;. In a path a pad name is that pad's centre, name@x,y a point inside that pad or via, vN(x,y) a via of type N, cw(c..) or ccw(c..) an arc to the next point about the centre after c; other vN are vias at no path point)
3V3: C13.2 C29.2 C30.2 C31.2 C32.2 C34.1 F4.1 P1.2 P2.6 P6.6 R29.2 R37.1 R38.1 R39.2 R41.2 R66.2 U2.4 U4.28 U4.40 U5.8 X1.1 X1.4 | length 63.4
  Top Layer w0.254: C30.2@88.791,117.348 88.791,117.493 89.426,118.128 90.914,118.128 92.202,116.84 U4.28@92.902,116.84 ; R29.2@99.06,126.988 99.06,127.635 99.326,127.901 F4.1@99.326,128.27
  Top Layer w0.406: C13.2@90.92,133.4 v2(90.92,134.366) v2(91.948,134.366) 92.683,134.366 U2.4@92.878,134.561 ; v2(94.361,109.601) 94.984,108.978 R39.2@94.984,104.902 ; v2(98.298,128.524) 99.072,128.524 F4.1@99.326,128.27 ; C31.2@98.744,108.458 98.744,109.158 99.352,109.766 U4.40@99.352,111.19 v2(99.352,112.687) ; C34.1@101.792,96.901 102.235,96.901 102.997,97.663 ; U5.8@102.997,98.954 102.997,97.663 ; v2@103.958,126.372 103.985,126.085 R41.2@103.995,125.21 ; v2(104.013,97.663) 102.997,97.663 ; v2(106.172,88.9) 106.229,88.957 P2.6@106.229,89.916
  Top Layer w0.61: v2(87.63,112.522) 88.708,112.522 ; C29.2@88.708,111.379 88.708,112.522 ; X1.4@88.773,115.364 88.773,113.881 88.708,113.816 88.708,112.522 ; R66.2@90.92,129.032 v2(92.202,129.032) ; C32.2@111.379,93.661 112.141,92.899 v2(112.141,92.837)
  Mid-Layer 1 w0.61: 104.2,96.4 104.2,95.8 104.623,95.377 112.141,95.377 v2(112.141,92.837) 111.455,93.523 108.636,93.523 107.224,92.111 107.224,91.435 P6.6@107.243,91.415
  Bottom Layer w0.406: v2(106.172,88.9) 106.172,90.043 107.243,91.114 P6.6@107.243,91.313
  Bottom Layer w0.61: v2(90.92,134.366) v2(91.948,134.366) 91.948,140.97 92.964,141.986 P1.2@92.964,142.113
  other v2: 91.313,117.729 103.886,126.365
3V3_CLEAN: C51.2 P5.6 P7.6 U9.5 | length 12.2
  Top Layer w0.305: P7.6@94.037,89.789 94.037,88.843 v2(94.107,88.773)
  Top Layer w0.406: U9.5@91.624,95.057 91.799,95.232 94.825,95.232 C51.2@94.996,95.061 C51.2@95.021,95.061 ; C51.2@95.123,95.061 C51.2@95.021,95.061 ; P5.6@96.067,91.313 96.067,94.015 C51.2@95.021,95.061
  Bottom Layer w0.305: v2(94.107,88.773) 94.107,89.353 P5.6@96.067,91.313
5V: C40.2 C43.2 F8.2 F9.2 QE1.2 QE2.2 R50.2 R65.2 U6.16 U7.4 | length 50.3
  Top Layer w0.406: v2(87.757,105.664) 87.884,105.537 87.884,105.029 87.896,105.041 R50.2@87.896,104.775 ; v2(96.52,99.949) 96.774,99.695 U6.16@96.774,97.676 C40.2@96.774,95.631
  Top Layer w0.45: v2@85.979,139.7 v2(86.157,139.878) v2(90.2,139.878) 90.322,139.878 90.9,139.3 C43.2@90.9,138.7
  Top Layer w0.61: v2@85.979,139.7 85.979,137.293 88.023,135.249 R65.2@88.023,134.747
  Mid-Layer 1 w0.406: 96.8,99.3 97.1,99
  Mid-Layer 1 w0.609: v2(86.157,139.878) v2(90.2,139.878)
  Mid-Layer 2 w0.5: v2(96.52,99.949) 96.651,99.949 99.7,96.9 v2@105.524,96.9
  Mid-Layer 2 w0.609: v2(90.2,139.878) 90.822,139.878 93.5,137.2 96.6,137.2 100.2,133.6 103.9,133.6 v2(105.5,132)
  other v2: 105.5,96.9 86.5,136.7 86.1,137.2
5V_CLEAN: C48.2 P2.8 P6.8 U8.5 | length 11.7
  Top Layer w0.406: U8.5@105.975,95.057 106.676,95.758 108.777,95.758 C48.2@109.474,95.061 109.79,95.061 110.33,94.521 P6.8@110.33,91.146 ; P2.8@107.829,89.789 108.719,89.789 P6.8@110.243,91.313 P6.8@110.33,91.4
5V_M1: C80.2 C81.2 F9.1 MOTOR1.4 R6.1 R8.2 R43.1 R44.1 R45.1 | length 99.9
  Top Layer w0.406: F9.1@105.3,130.15 105.3,129.8 v2(105.7,129.4) 105.93,129.17 R43.1@105.93,128.27 105.93,127.67 106.184,127.416 R44.1@106.184,126.746 R45.1@106.184,125.222 ; v2(119.253,120.142) 119.38,120.269 R8.2@119.38,121.17 ; v2(119.507,133.35) R6.1@119.507,134.124 ; v2(128.9,134.6) 128.894,134.606 128.894,137.968 129.192,138.267 137.333,138.267 138.4,137.2 v2(138.4,136.8)
  Mid-Layer 1 w0.406: 118.11,133.35 v2(119.507,133.35)
  Mid-Layer 2 w0.6: v2(138.4,136.8) 142.7,141.1 152.1,141.1 153.8,139.4 164,139.4 169.1,134.3 199.4,134.3 200.4,133.3 MOTOR1.4@200.7,133.3
  Bottom Layer w0.406: v2(119.507,133.35) 128.15,133.35 128.9,134.1 v2(128.9,134.6)
5V_M2: C82.2 C83.2 F8.1 MOTOR2.4 R20.1 R22.2 R46.1 R47.1 R48.1 | length 111.1
  Top Layer w0.254: R20.1@118.733,112.649 118.733,111.784 v2(119.011,111.506)
  Top Layer w0.4: R47.1@106.426,100.965 R46.1@106.426,102.489
  Top Layer w0.406: R47.1@106.426,100.965 R48.1@106.426,99.441 106.438,99.429 106.438,98.667 107.315,97.79 ; v2@119.9,97.536 R22.2@119.9,98.298
  Top Layer w0.508: F8.1@107,96.9 107,97.7 107.09,97.79 107.315,97.79 v2(107.95,97.79)
  Mid-Layer 1 w0.406: 117.741,98.298 119.126,98.298 v2(119.888,97.536) v5@129.812,87.612
  Mid-Layer 1 w0.61: 118.503,107.569 119.507,107.569 119.634,107.696
  Mid-Layer 2 w0.6: v5(129.8,87.7) 196.5,87.7 198.7,89.9 v5(198.7,94)
  Bottom Layer w0.406: v5(198.7,94) 199.114,94.414 199.114,96.514 199.9,97.3 201.1,97.3 202.1,98.3 202.1,100.3 MOTOR2.4@200.55,101.85
A1: L1.2 MOTOR1.3
  other v1: 194.925,115.6 195.875,115.6 196.825,115.6 197.775,115.6 198.725,115.6 199.675,115.6 195.4,116.1 196.35,116.1 197.3,116.1 198.25,116.1 199.2,116.1 194.925,116.6 195.875,116.6 196.825,116.6 197.775,116.6 198.725,116.6 199.675,116.6 195.4,117.1 196.35,117.1 197.3,117.1 198.25,117.1 199.2,117.1 194.925,117.6 195.875,117.6 196.825,117.6 197.775,117.6 198.725,117.6 199.675,117.6 195.4,118.1 196.35,118.1 197.3,118.1 198.25,118.1 199.2,118.1
A2: L4.2 MOTOR2.3
AGND: C2.2 C3.1 C4.1 C7.1 C9.2 C10.1 C11.1 C12.1 C14.1 C17.2 C18.1 C19.1 C22.1 C24.2 C25.1 C26.1 C27.1 C36.1 C42.1 C45.1 C46.1 C53.2 C54.2 C55.2 C56.2 C57.2 C58.2 C59.2 C60.2 C61.2 C62.2 C63.2 C64.2 C80.1 C81.1 C82.1 C83.1 F3.2 MOTOR1.5 MOTOR2.5 P3.2 P3.3 pad.0@128.5,93.9 pad.0@128.7,123.4 pad.@113.213,141.478 pad.@116.713,141.478 R4.1 R10.1 R11.1 R13.1 R18.1 R24.1 R25.1 R27.1 SERVO.1 SERVO.2 U1.17 U1.21 U1.41 U1.49 U3.17 U3.21 U3.41 U3.49 | length 150.3
  Top Layer w0.254: 113.157,120.154 113.157,120.204 113.147,122.057 114.164,123.073 114.164,123.074 114.312,123.223 U1.17@114.312,124.678 ; 113.532,97.362 113.532,100.046 114.304,100.819 U3.17@114.304,102.306 ; U1.17@114.312,124.703 114.312,128.028 v3(115.062,128.778) 115.812,129.528 U1.41@115.812,132.853 ; U3.17@114.324,102.351 114.324,105.676 v3(115.074,106.426) 115.824,107.176 U3.41@115.824,110.501 ; C17.2@115.178,114.3 115.178,113.168 115.824,112.522 U3.41@115.824,110.526 ; U1.41@115.812,132.878 115.812,135.497 116.14,135.825 C2.2@116.459,135.825 ; U1.21@116.312,124.678 116.312,123.349 116.713,122.948 116.713,119.888 116.205,119.38 116.205,115.712 116.507,115.41 117.681,115.41 117.892,115.621 120.184,115.621 120.837,116.274 120.837,116.381 121.805,117.348 125.348,117.348 126.491,118.491 R13.1@127.352,118.491 ; U3.21@116.344,102.306 116.344,100.996 116.979,100.361 116.967,100.349 116.967,96.647 116.586,96.266 C46.1@116.713,96.266 ; C46.1@116.648,96.139 116.713,96.074 116.713,93.091 117.094,92.71 118.11,92.71 118.491,93.091 118.491,93.968 119.061,94.539 121.096,94.539 122.162,93.472 125.528,93.472 127.86,91.14 R27.1@127.86,90.58 ; v2(118.237,97.536) 118.376,97.675 R24.1@118.376,98.298 ; R13.1@127.352,119.791 R13.1@127.479,119.664 ; R27.1@127.435,90.297 R27.1@127.626,90.487 ; R27.1@127.66,89.535 R27.1@127.66,90.58
  Top Layer w0.3: C4.1@106.6,132.4 106.618,132.382 v2(106.618,130.429)
  Top Layer w0.4: C4.1@106.6,132.4 106.6,133.4 107.696,134.496 v2(107.696,134.747) 107.696,135.396 108.255,135.955 C7.1@110.236,135.955 ; C18.1@107,108.8 C19.1@107,110.1 107,111.5 108.403,112.903 v2(109.474,112.903) 109.92,112.903 C22.1@110.617,113.6
  Top Layer w0.406: v2(118.11,120.142) R10.1@118.11,121.17
  Top Layer w0.61: C14.1@98.436,136.652 98.806,137.022 98.806,138.164 98.794,138.176 F3.2@98.794,138.557 ; C14.1@98.552,136.525 v4(100.584,136.525) v4(101.6,136.525) v4(102.616,136.525) ; R11.1@110.744,120.154 110.794,120.204 C11.1@112.268,120.204 ; R25.1@111.06,97.344 C26.1@112.534,97.344 114.743,97.344 115.251,97.852 C27.1@116.078,97.852 ; C11.1@112.218,120.154 C11.1@112.268,120.204 ; C12.1@115.57,120.204 113.157,120.204 C11.1@112.268,120.204
  Top Layer w1.016: C36.1@104.347,138.176 SERVO.2@104.347,140.509 ; C10.1@118.999,114.474 119.046,114.427 C24.2@123.19,114.427 ; C25.1@119.888,93.218 C25.1@119.888,93.392 ; 121.666,91.44 122.911,91.44 C9.2@123.698,90.653
  Top Layer w1.27: C25.1@119.888,93.218 121.666,91.44
  Top Layer w1.905: C24.2@123.19,114.427 C24.2@123.444,114.681
  Mid-Layer 2 w0.61: v4(100.584,136.525) v4(101.6,136.525) v4(102.616,136.525) 106.68,136.525 107.188,136.017 110.744,136.017 113.03,138.303 P3.2@113.213,138.303 ; v3(117.462,128.778) 121.412,128.778 121.666,128.524 ; v3@117.493,107.645 121.234,107.645 121.183,107.696
  other v1: 124,88.05 125,88.05 126,88.05 120.95,88.075 121.95,88.075 122.95,88.075 124.5,88.525 125.5,88.525 121.45,88.55 122.45,88.55 123.45,88.55 124,89 125,89 126,89 148.4,89 149.4,89 150.4,89 120.95,89.025 121.95,89.025 122.95,89.025 124.45,89.475 125.5,89.475 148.9,89.475 149.9,89.475 121.45,89.5 122.5,89.5 123.45,89.5 124,89.95 125,89.95 126,89.95 148.4,89.95 149.4,89.95 150.4,89.95 120.95,89.975 121.95,89.975 122.95,89.975 148.9,90.425 149.9,90.425 148.4,90.9 149.4,90.9 150.4,90.9 148.9,91.375 149.9,91.375 148.4,91.85 149.4,91.85 150.4,91.85 132.5,102.175 133.5,102.175 132,102.65 133,102.65 134,102.65 132.5,103.125 133.5,103.125 132,103.6 133,103.6 134,103.6 132.5,104.075 133.5,104.075 132,104.55 133,104.55 134,104.55 132.5,105.025 133.5,105.025 132,105.5 133,105.5 134,105.5 132.5,105.975 133.5,105.975 132,106.45 133,106.45 134,106.45 132.5,106.925 133.5,106.925 125.1,113.05 126.1,113.05 127.1,113.05 122.05,113.075 123.05,113.075 124.05,113.075 125.6,113.525 126.6,113.525 122.55,113.55 123.55,113.55 124.55,113.55 125.1,114 126.1,114 127.1,114 122.05,114.025 123.05,114.025 124.05,114.025 125.55,114.475 126.6,114.475 122.55,114.5 123.6,114.5 124.55,114.5 125.1,114.95 126.1,114.95 127.1,114.95 122.05,114.975 123.05,114.975 124.05,114.975 147.2,117.95 148.2,117.95 149.2,117.95 150.2,117.95 151.2,117.95 147.7,118.425 148.7,118.425 149.7,118.425 150.7,118.425 147.2,118.9 148.2,118.9 149.2,118.9 150.2,118.9 151.2,118.9 147.7,119.375 148.7,119.375 149.7,119.375 150.7,119.375 147.2,119.85 148.2,119.85 149.2,119.85 150.2,119.85 151.2,119.85 147.7,120.325 148.7,120.325 149.7,120.325 150.7,120.325 147.2,120.8 148.2,120.8 149.2,120.8 150.2,120.8 151.2,120.8 132.4,132.025 133.4,132.025 131.9,132.5 132.9,132.5 133.9,132.5 132.4,132.975 133.4,132.975 131.9,133.45 132.9,133.45 133.9,133.45 132.4,133.925 133.4,133.925 131.9,134.4 132.9,134.4 133.9,134.4 132.4,134.875 133.4,134.875 131.9,135.35 132.9,135.35 133.9,135.35 132.4,135.825 133.4,135.825 131.9,136.3 132.9,136.3 133.9,136.3 132.4,136.775 133.4,136.775
  other v2: 113.538,96.52 119.634,101.854 118.745,102.743 106.6,109.2 118.745,110.109 111.125,119.253 113.411,119.253 108.077,123.825 111.506,132.334 118.618,132.334 110.109,133.604 120.65,134.112 121.539,134.112
  other v3: 112.674,104.026 113.874,104.026 115.074,104.026 116.274,104.026 117.474,104.026 112.674,105.226 113.874,105.226 115.074,105.226 116.274,105.226 117.474,105.226 112.674,106.426 113.874,106.426 116.274,106.426 117.474,106.426 112.674,107.626 113.874,107.626 115.074,107.626 116.274,107.626 117.474,107.626 112.674,108.826 113.874,108.826 115.074,108.826 116.274,108.826 117.474,108.826 112.662,126.378 113.862,126.378 115.062,126.378 116.262,126.378 117.462,126.378 112.662,127.578 113.862,127.578 115.062,127.578 116.262,127.578 117.462,127.578 112.662,128.778 113.862,128.778 116.262,128.778 112.662,129.978 113.862,129.978 115.062,129.978 116.262,129.978 117.462,129.978 112.662,131.178 113.862,131.178 115.062,131.178 116.262,131.178 117.462,131.178
  other v5: 196.5,132 198.1,132
  other v7: 197.5,99.1 198.8,99.1
AGND2: C33.1 C38.1 C39.1 F5.2 U4.16 | length 16.3
  Top Layer w0.406: F5.2@90.92,127.508 91.694,127.508 v2(92.202,128.016) ; C39.1@94.234,126.938 95.123,126.938 ; v2@95.123,127.889 95.123,126.938 ; C38.1@96.012,126.938 95.123,126.938 ; U4.16@99.352,122.49 99.352,123.863 ; v2(99.568,124.079) 99.695,124.079 C33.1@100.996,125.38
  Mid-Layer 2 w0.406: v2(92.202,128.016) 92.329,128.143 v2@95.123,128.143 ; v2@95.504,128.143 v2(99.568,124.079)
  other v2: 95.25,128.143
B1: L2.2 MOTOR1.1
B2: L5.2 MOTOR2.1
  other v1: 182.5,119.753 183.45,119.753 184.4,119.753 185.35,119.753 186.3,119.753 187.25,119.753 188.2,119.753 189.15,119.753 190.1,119.753 191.05,119.753 192,119.753 192.95,119.753 182.975,120.253 183.925,120.253 184.875,120.253 185.825,120.253 186.775,120.253 187.725,120.253 188.675,120.253 189.625,120.253 190.575,120.253 191.525,120.253 192.475,120.253 193.425,120.253 182.5,120.753 183.45,120.753 184.4,120.753 185.35,120.753 186.3,120.753 187.25,120.753 188.2,120.753 189.15,120.753 190.1,120.753 191.05,120.753 192,120.753 192.95,120.753 182.975,121.253 183.925,121.253 184.875,121.253 185.825,121.253 186.775,121.253 187.725,121.253 188.675,121.253 189.625,121.253 190.575,121.253 191.525,121.253 192.475,121.253 193.425,121.253 182.5,121.752 183.45,121.752 184.4,121.752 185.35,121.752 186.3,121.752 187.25,121.752 188.2,121.752 189.15,121.752 190.1,121.752 191.05,121.752 192,121.752 192.95,121.752 182.975,122.252 183.925,122.252 184.875,122.252 185.825,122.252 186.775,122.252 187.725,122.252 188.675,122.252 189.625,122.252 190.575,122.252 191.525,122.252 192.475,122.252 193.425,122.252
BUS_1: D5.2 R39.1 U4.25 U5.1 | length 40
  Top Layer w0.254: v2(91.694,110.617) 88.138,110.617 88.138,110.626 87.766,110.998 87.757,110.998 87.249,111.506 87.249,111.887 86.614,112.522 86.614,117.348 88.519,119.253 91.173,119.253 91.186,119.24 U4.25@92.902,119.24
  Top Layer w0.305: v2(92.71,105.918) 92.849,105.791 R39.1@93.484,105.156 ; v2(99.949,103.251) 102.108,103.251 102.997,104.14 U5.1@102.997,104.754
  Top Layer w0.406: D5.2@90.019,106.743 90.233,106.743 90.826,106.151 90.826,106.139 91.064,105.901 92.5,105.901 92.518,105.918 v2(92.71,105.918)
  Bottom Layer w0.254: v2(91.694,110.617) 92.202,110.109 92.202,109.338 92.574,108.966 92.579,108.966 94.176,107.369
  Bottom Layer w0.305: v2(92.71,105.918) 94.151,107.359 ; 94.176,107.369 94.176,107.333 95.972,105.537 97.155,105.537 99.441,103.251 v2(99.949,103.251)
BUS_2: D4.2 U4.26 U5.4 | length 24.8
  Top Layer w0.305: D4.2@90.082,108.458 90.229,108.458 91.245,109.474 92.71,109.474 v2(92.837,109.601) ; U4.26@92.902,118.44 93.904,118.44 94.742,117.602 v2(94.742,116.637) ; U5.4@99.187,104.754 99.187,105.791 v2(99.695,106.299)
  Bottom Layer w0.305: v2(94.742,116.637) 94.463,116.357 93.877,116.357 92.964,115.444 92.964,109.728 v2(92.837,109.601) 92.837,109.391 94.351,107.877 94.387,107.877 94.684,107.579 94.684,107.543 96.056,106.172 99.568,106.172 v2(99.695,106.299)
BUS_EN: U4.27 U5.2 U5.3 | length 20.4
  Top Layer w0.254: U4.27@92.902,117.64 92.94,117.602 93.596,117.602 94.107,117.091 94.107,116.589 94.107,116.291 94.107,115.443 v2(94.361,115.189) ; U5.3@100.457,104.754 U5.2@101.727,104.754 ; U5.2@101.727,104.119 v2@101.727,107.823
  Bottom Layer w0.254: v2(94.361,115.189) 94.361,112.513 98.924,107.95 101.473,107.95 101.6,108.077 v2(101.6,107.95)
C1: L3.2 MOTOR1.2
C2: L6.2 MOTOR2.2
DGND: C13.1 C15.1 C28.1 C29.1 C30.1 C31.1 C32.1 C34.2 C35.1 C40.1 C43.1 C44.1 C47.1 C48.1 C49.1 C50.1 C51.1 C52.1 D2.2 D3.2 D6.2 F3.1 F5.1 P1.3 P2.1 P5.1 P6.1 P7.1 QE1.3 QE2.3 R52.1 RS485.4 U2.5 U2.6 U2.7 U2.8 U4.6 U4.29 U4.39 U5.5 U6.8 U7.5 U7.6 U7.7 U7.8 U8.2 U9.2 X1.2 | length 37.1
  Top Layer w0.254: C30.1@90.108,117.348 90.424,117.348 91.732,116.04 U4.29@92.902,116.04 U4.29@92.864,116.078
  Top Layer w0.305: P5.1@88.567,91.259 P5.1@88.567,91.263 ; F3.1@97.294,138.557 97.294,139.688
  Top Layer w0.406: D3.2@87.796,131.572 D2.2@87.796,133.223 ; U6.8@87.884,102.476 87.884,101.219 v2(88.392,100.711) ; F5.1@89.42,127.508 89.408,127.496 89.408,126.746 v2(90.043,126.111) ; U2.5@92.878,130.361 U2.6@93.528,130.361 U2.7@94.178,130.361 U2.8@94.828,130.361 95.191,130.361 95.515,130.037 C15.1@96.774,130.037 ; v2(97.282,107.442) 97.344,107.504 C31.1@97.344,108.458 97.344,108.62 98.552,109.828 U4.39@98.552,111.19 ; U4.6@104.202,116.84 105.283,116.84 v2(105.537,116.713) v2(106.299,116.713) 107.95,116.713 ; C28.1@107.95,117.667 107.95,116.713 ; C35.1@109.79,116.586 108.469,116.586 108.342,116.713 107.95,116.713
  Top Layer w0.5: C44.1@89.5,137.3 C43.1@90.897,137.3
  Top Layer w0.61: C29.1@90.108,111.379 90.108,112.206 v2(90.551,112.649) 90.551,113.588 X1.2@90.512,113.627 ; v2(90.17,130.175) v2@91.186,130.175 ; 91.059,131.318 v2@91.059,130.302 ; C13.1@91.059,131.661 v2@91.059,130.302 ; U2.5@92.878,130.361 92.692,130.175 v2@91.186,130.175 ; U5.5@99.187,98.954 99.187,97.04 99.326,96.901 C34.2@100.392,96.901 ; v2@91.059,130.302 v2@91.186,130.175
  other v2: 94.996,92.583 109.474,92.71 113.03,93.599 98.298,94.615 96.012,95.123 99,95.3 98.1,95.4 98.7,96.1 99.4,96.1 98,96.3 98.6,96.9 97.8,97.1 84.074,99.06 102.489,100.584 94.234,104.14 100.711,106.299 87.503,116.459 91.313,116.459 87.122,121.285 90.932,130.175 91.694,130.175 94.91,130.361 95.4,131.1 93.491,131.114 94.507,131.114 103.378,131.318 92.964,131.826 93.98,131.826 94.996,131.826 90.6,135.2 99.949,135.255 85.982,135.524 85.09,135.89 84.201,136.144 90.2,137.3 95.25,138.176 96.012,138.938 96.901,139.7
DR1_V5: C3.2 C4.2 R34.2 U1.3 U1.4 | length 7.9
  Top Layer w0.254: R34.2@108.8,133.55 108,132.75 C4.2@108,132.4 C3.2@108,131 108.452,130.548 109.5,130.548 ; U1.4@110.987,130.028 109.872,130.028 109.5,130.4 109.5,130.548 ; U1.3@110.987,130.528 110.967,130.548 109.5,130.548